# Altium PCB CSC002.pcbdoc (part 2 of 3)
Units mm, origin at the board's own origin, x right, y up, seen from the top; angles counter-clockwise.
Board outline 159.86 x 75.13 mm, 6 copper layers (Top Layer, Mid-Layer 1, Mid-Layer 2, GND, POWER, Bottom Layer), stack 2.494 mm thick; 78 components, 188 nets, 791 pads, 358 vias.
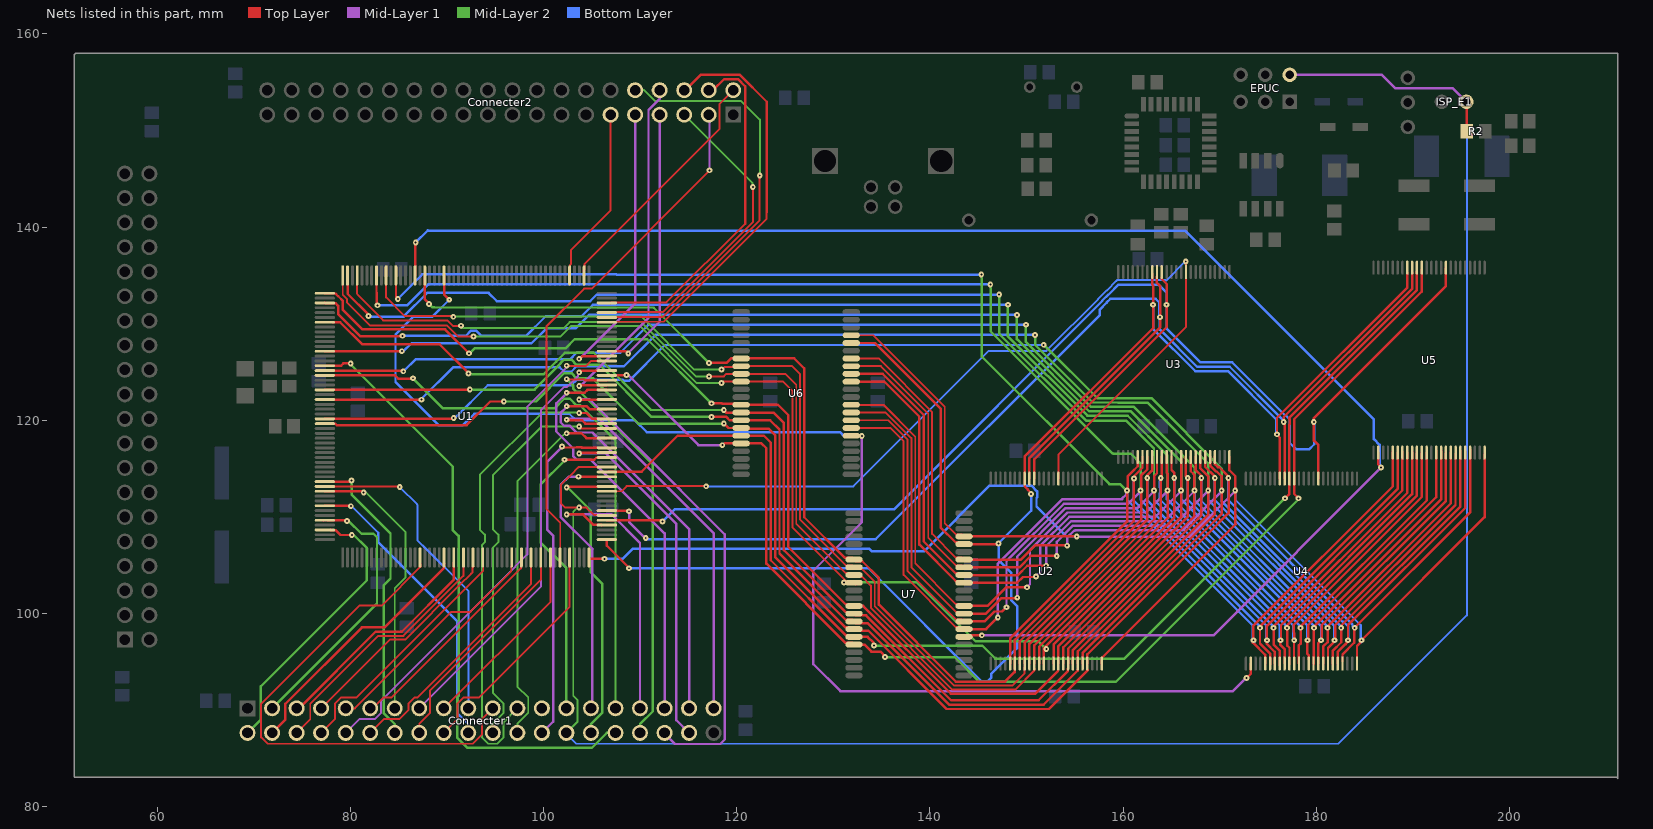
[diagram p6: the nets of this part, all layers, seen from the top]

## Via types
v1: diameter 0.6, hole 0.2, Top Layer to Bottom Layer, 354 vias
v2: diameter 0.6/0.6/0.6/0.6/0.6/0.6 (per signal layer), hole 0.2, Top Layer to Bottom Layer, 1 vias
v3: diameter 0.6, hole 0.2, Top Layer to Bottom Layer, tented bottom, 1 vias
v4: diameter 0.6, hole 0.2, Top Layer to Bottom Layer, tented top, 1 vias
v5: diameter 7, hole 3.5, Top Layer to Bottom Layer, 1 vias

## Nets (pads, with @x,y where several pads share a name; then routed paths per layer and width w, separated by ;. In a path a pad name is that pad's centre, name@x,y a point inside that pad or via, vN(x,y) a via of type N, cw(c..) or ccw(c..) an arc to the next point about the centre after c; other vN are vias at no path point) (continued)
A.16: U1.104 U2.48 U3.48 U4.48 U5.48 U6.19 U7.19 | length 189.5
  Top Layer w0.2: U6.19@131.853,128.8 134.131,128.8 141.537,121.394 141.537,109.323 142.688,108.172 U7.19@143.337,108.172
  Top Layer w0.254: 104.85,105.65 v1(106.3,105.65) ; U7.19@143.537,107.972 v2@155.11,107.972 ; U2.48@157.804,94.808 157.804,95.414 171.625,109.235 ; U3.48@171.012,116.202 171.012,114.818 171.62,114.21 171.62,109.27 171.65,109.24 ; U4.48@184.22,94.808 184.22,96.621 184.65,97.051 v1@184.65,97.19 ; v1(184.69,97.22) 197.44,109.97 U5.48@197.44,116.47
  Mid-Layer 1 w0.254: v2(155.2,107.95) 166.86,107.95 ; 166.92,107.96 v1@171.66,112.7
  Bottom Layer w0.254: v1(106.3,105.65) 108.18,105.65 109.21,106.68 133.743,106.68 134,106.423 139.376,106.423 146.18,113.227 150.5,113.227 151.097,112.63 151.097,112.044 151.033,111.98 151.033,111.074 154.137,107.97 v2@155.2,107.97 ; v1(171.61,112.72) 171.61,111.767 184.607,98.77 184.607,97.083 v1@184.66,97.03
A.17: U1.105 U2.17 U3.17 U4.17 U5.17 U6.18 U7.18 | length 176.4
  Top Layer w0.254: U1.105@106.548,107.646 106.548,107.002 v1@108.825,104.725 ; U6.18@131.853,128 134.327,128 141.11,121.217 141.11,108.912 142.677,107.345 U7.18@143.364,107.345 ; U7.18@143.537,107.172 147.002,107.172 v1@147.08,107.25 ; U7.18@143.85,107.15 U7.18@143.97,107.03 ; U2.17@149.8,113.76 U2.17@149.8,113.957 ; U2.17@149.8,114.22 U2.17@149.8,113.957 ; U2.17@149.804,113.957 149.804,113.165 150.151,112.818 150.151,112.779 v1@150.39,112.54 ; U3.17@163.01,135.15 163.01,134.06 163.121,133.949 163.121,129.549 149.8,116.228 U2.17@149.8,113.957 ; v1(175.94,118.54) 175.94,120.262 189.437,133.759 U5.17@189.437,135.293 ; v1@175.95,118.48 176.22,118.21 U4.17@176.22,113.957
  Bottom Layer w0.254: v1@108.9,104.67 133.623,104.67 145.33,92.963 145.97,92.963 146.337,93.33 146.337,93.723 149.027,96.413 149.027,100.756 148.413,101.37 148.413,104.227 147.11,105.53 v1@147.11,107.26 ; v1@147.03,107.34 v1@147.11,107.26 ; v1(147.1,107.25) v1@147.11,107.26 ; v1@150.49,112.33 150.49,110.64 v1@147.11,107.26 ; v1(163.11,131.96) 163.11,129.454 167.478,125.086 170.861,125.086 175.857,120.09 175.857,118.663 v1@176,118.52
  other v1: 108.85,104.675 150.47,112.37
A.18: U1.111 U2.16 U3.16 U4.16 U5.16 | length 142.4
  Top Layer w0.254: U1.111@107.1,110.625 107.102,110.623 108.802,110.623 v1(108.85,110.575) ; U2.16@150.3,113.93 150.3,116.086 163.827,129.613 163.827,133.903 163.51,134.22 U3.16@163.51,134.88 ; v1@176.62,119.77 176.72,119.67 U4.16@176.72,113.957 ; v1(176.63,119.83) 176.63,120.31 189.93,133.61 U5.16@189.93,135.29
  Mid-Layer 1 w0.254: v1(108.85,110.575) 108.85,109.45 v1@110.5,107.8
  Bottom Layer w0.254: v1@110.625,107.677 134.374,107.677 157.593,130.896 157.593,131.457 158.303,132.167 158.303,132.199 158.67,132.567 158.703,132.567 158.723,132.587 163.37,132.587 163.737,132.22 163.737,130.713 v1@163.79,130.66 ; v1(163.82,130.67) 163.82,129.386 167.666,125.54 171.049,125.54 176.699,119.89 v1@176.72,119.89
  other v1: 110.575,107.8
A.19: U1.109 U2.15 U3.15 U4.9 U5.9 | length 150.7
  Top Layer w0.254: U1.109@106.548,109.646 112.179,109.646 v1(112.3,109.525) ; U2.15@150.8,113.957 150.8,115.944 164.52,129.664 164.52,134.1 164.02,134.6 U3.15@164.02,134.76 ; v1@179.75,119.76 179.75,117.894 180.22,117.424 U4.9@180.22,113.957 ; v1(179.75,119.81) 179.75,120.219 193.43,133.899 U5.9@193.43,135.751
  Bottom Layer w0.254: v1(112.3,109.525) 113.552,110.777 136.271,110.777 157.849,132.355 ; 157.849,132.387 158.482,133.021 ; 158.515,133.021 159.534,134.04 163.68,134.04 164.497,133.223 v1@164.497,131.96 ; v1@164.51,131.88 164.51,129.496 168.012,125.994 171.303,125.994 176.84,120.457 ; 176.89,120.457 177.257,120.09 177.257,117.663 177.94,116.98 179.25,116.98 179.79,117.52 v1@179.79,119.81
  other v1: 164.51,131.96
A.20: U1.115 U2.10 U3.10 | length 98
  Top Layer w0.2: U1.115@106.548,112.646 108.071,112.646 108.6,113.175 v1@116.85,113.175 ; U2.10@153.27,113.85 153.31,113.89 153.31,116.426 166.512,129.628 U3.10@166.512,135.351 v1@166.512,136.318
  Bottom Layer w0.2: v1@116.875,113.15 132.069,113.15 146.099,127.18 152.07,127.18 157.422,132.532 157.422,132.564 158.305,133.448 158.338,133.448 159.313,134.423 159.313,134.467 159.366,134.52 164.404,134.52 164.457,134.467 166.455,136.465 v1@166.57,136.58
  other v1: 116.83,113.16 166.49,136.43
BLS0: U1.119 U4.15 U5.15 U6.39 U7.39 | length 124.1
  Top Layer w0.254: U1.119@106.68,114.669 110.144,114.669 113.875,118.4 U6.39@120.453,118.4 122.801,118.4 123.515,117.686 123.515,105.507 131.277,97.745 131.964,97.745 U7.39@132.137,97.572 133.548,97.572 134.14,96.98 ; v1(176.77,111.92) 177.22,112.37 ; 177.22,112.41 U4.15@177.22,113.957 177.2,113.977 177.2,119.513 177.257,119.57 177.257,120.09 177.2,120.147 177.2,120.238 190.43,133.468 U5.15@190.43,135.36
  Mid-Layer 2 w0.254: v1(134.2,96.67) 134.221,96.649 145.431,96.649 146.78,95.3 160.1,95.3 ; 160.145,95.325 v1@176.73,111.91
BLS1: U1.139 U4.14 U5.14 U6.40 U7.40 | length 128.8
  Top Layer w0.254: U1.139@107.11,124.66 107.119,124.669 v1@108.539,124.669 ; v1@118.73,117.6 U6.40@120.453,117.6 ; U6.40@120.65,117.49 120.76,117.6 122.558,117.6 123.061,117.097 123.061,105.161 131.277,96.945 131.964,96.945 U7.40@132.137,96.772 ; U7.40@132.824,96.772 U7.40@132.137,96.772 ; v1@135.41,95.5 134.867,96.043 133.94,96.043 133.211,96.772 U7.40@132.137,96.772 ; U4.14@177.72,113.957 177.72,112.37 v1@178.16,111.93 ; U4.14@177.72,114.05 177.72,120.116 190.93,133.326 U5.14@190.93,135.61
  Mid-Layer 1 w0.254: v1@108.61,124.83 116.02,117.42 v1(118.5,117.42)
  Mid-Layer 2 w0.254: v1(135.36,95.48) 142.566,95.48 145.136,92.91 147.267,92.91 147.27,92.913 159.243,92.913 v1@178.2,111.87
  other v1: 178.17,111.92 108.57,124.7
CS0: U1.187 U4.26 U6.6 | length 140.1
  Top Layer w0.254: U1.187@89.698,134.996 89.698,133.002 v1@90.19,132.51 ; v1@172.83,93.35 173.22,93.74 U4.26@173.22,94.808
  Mid-Layer 1 w0.254: v1(132.95,118.37) 132.95,109.437 127.925,104.412 127.925,94.75 130.722,91.953 171.363,91.953 v1@172.79,93.38
  Bottom Layer w0.254: v1(90.23,132.48) 88.49,130.74 86.513,130.74 84.663,128.89 84.663,123.95 89.11,119.503 91.65,119.503 92.824,120.677 102.65,120.677 103.34,119.987 109.462,119.987 110.682,118.767 130.68,118.767 130.987,118.46 v1@132.92,118.46
  other v1: 172.78,93.32
CS1: U1.193 U5.26 U7.6 | length 168.1
  Top Layer w0.254: v1@86.66,138.44 86.698,138.402 U1.193@86.698,134.996 ; U7.6@143.89,97.73 v1(145.37,97.73) ; U5.26@186.428,116.652 186.428,115.422 v1@186.74,115.11
  Mid-Layer 1 w0.254: v1(145.37,97.73) 169.35,97.73 v1@186.71,115.09
  Bottom Layer w0.254: v1(86.75,138.4) 88.02,139.67 ; 88.06,139.64 166.407,139.64 185.977,120.07 185.977,118.039 186.57,117.446 v1@186.57,115.15
  other v1: 186.7,115.1
D.0: U1.197 U2.29 U3.29 U4.29 U5.29 U6.7 U7.7 | length 223.7
  Top Layer w0.2: v1@84.698,132.742 U1.197@84.698,134.996 ; U6.7@131.853,119.2 135.895,119.2 137.28,117.815 137.28,103.981 142.688,98.572 U7.7@143.337,98.572
  Top Layer w0.254: U7.7@143.537,98.372 145.822,98.372 v1@146.96,99.51 ; U2.29@148.304,94.808 148.3,94.811 148.3,97.401 160.41,109.511 v1(160.41,112.72) ; v1@160.34,112.73 160.473,112.863 160.473,114.194 160.916,114.637 160.919,114.637 161.52,115.238 U3.29@161.52,116.14 ; v1@173.45,97.13 173.45,96.982 174.72,95.712 U4.29@174.72,94.808 ; v1(173.49,97.22) 173.49,98.73 187.93,113.17 U5.29@187.93,116.71
  Mid-Layer 1 w0.254: v1(147.03,99.57) 147.03,105.161 153.677,111.808 159.91,111.808 ; 159.85,111.833 160.35,112.333 v1@160.35,112.65
  Mid-Layer 2 w0.254: v1@145.38,135.08 145.38,126.58 158.577,113.383 159.677,113.383 v1@160.34,112.72
  Bottom Layer w0.2: v1@160.3,112.84 v1@160.42,112.72
  Bottom Layer w0.254: v1@84.89,132.56 87.43,135.1 107.533,135.1 107.58,135.053 145.273,135.053 v1(145.32,135.1) ; v1(160.41,112.72) 160.41,111.767 173.407,98.77 173.407,97.263 v1@173.63,97.04
  other v1: 84.9,132.55
D.1: U1.201 U2.31 U3.31 U4.31 U5.31 U6.8 U7.8 | length 227.2
  Top Layer w0.2: U6.8@131.853,120 135.661,120 137.68,117.981 137.68,104.381 142.688,99.372 U7.8@143.337,99.372
  Top Layer w0.254: U1.201@82.698,134.996 82.698,133.212 82.73,133.18 82.73,132 v1@82.82,131.91 ; U7.8@143.537,99.172 145.646,99.172 146.671,100.197 147.447,100.197 v1@147.94,100.69 ; U2.31@149.304,94.808 149.304,97.121 161.902,109.718 ; 161.873,109.737 161.873,114.285 162.512,114.924 U3.31@162.512,116.202 ; U4.31@175.71,94.78 175.71,96.01 174.89,96.83 v1(174.89,97.22) 174.89,98.71 188.93,112.75 U5.31@188.93,116.754
  Mid-Layer 1 w0.254: v1(147.93,100.64) 147.93,105.419 153.865,111.354 160.56,111.354 ; 160.559,111.379 v1@161.9,112.72
  Mid-Layer 2 w0.254: v1@146.3,133.97 146.3,129.19 158.92,116.57 ; 158.96,116.55 160.8,116.55 161.81,115.54 v1(161.81,112.72)
  Bottom Layer w0.254: v1@82.75,131.9 v1(82.81,131.9) 85.87,131.9 88.03,134.06 v1(146.25,134.06) ; v1(161.81,112.72) 161.81,111.767 174.807,98.77 174.807,97.223 v1@174.99,97.04
D.2: U1.207 U2.33 U3.33 U4.33 U5.33 U6.9 U7.9 | length 231.4
  Top Layer w0.2: U6.9@131.853,120.8 135.427,120.8 138.08,118.147 138.08,104.781 142.688,100.172 U7.9@143.337,100.172
  Top Layer w0.254: U1.207@79.675,134.01 79.721,133.964 79.721,133.089 81.87,130.94 v1(81.87,130.81) ; U7.9@143.537,99.972 145.804,99.972 147.422,101.59 v1@149,101.59 ; U2.33@150.304,94.808 150.304,96.836 163.274,109.806 ; 163.21,109.76 163.21,114.207 163.512,114.509 U3.33@163.512,116.202 ; U4.33@176.72,94.82 176.72,96.31 176.29,96.74 v1(176.29,97.22) 176.353,97.283 176.353,98.77 176.72,99.137 176.723,99.137 189.93,112.344 U5.33@189.93,116.71
  Mid-Layer 1 w0.254: v1(149.04,101.63) 149.04,105.887 154.053,110.9 161.49,110.9 ; 161.485,110.925 v1@163.21,112.65
  Mid-Layer 2 w0.254: v1@147.17,132.96 147.17,128.962 156.202,119.93 160.34,119.93 163.2,117.07 v1@163.2,112.64
  Bottom Layer w0.254: v1@81.87,130.74 85.51,130.74 87.95,133.18 94.303,133.18 95.163,132.32 104.817,132.32 105.507,133.01 v1(147.17,133.01) ; v1(163.21,112.72) 163.21,111.767 176.207,98.77 176.207,97.123 v1@176.29,97.04
D.3: U1.3 U2.35 U3.35 U4.35 U5.35 U6.10 U7.10 | length 233.9
  Top Layer w0.2: U6.10@131.853,121.6 135.192,121.6 138.48,118.313 138.48,105.181 142.688,100.972 U7.10@143.337,100.972 ; U4.35@177.72,94.71 v1(177.72,97.22)
  Top Layer w0.254: U1.3@77.348,132.146 77.371,132.123 78.446,132.123 78.725,131.844 78.725,130.995 81.03,128.69 v1@85.35,128.69 ; U1.3@77.81,132.13 U1.3@77.817,132.123 ; U7.10@143.537,100.772 145.962,100.772 147.88,102.69 v1@149.99,102.69 ; U2.35@151.304,94.808 151.304,96.552 164.66,109.908 ; U3.35@164.51,116.2 U3.35@164.512,116.202 164.512,114.576 164.64,114.448 164.64,109.93 164.661,109.909 ; v1(177.72,97.22) 177.69,98.82 190.93,112.06 190.93,116.564 U5.35@190.94,116.574
  Mid-Layer 1 w0.254: v1(150.04,102.7) 150.363,103.023 150.363,106.568 154.241,110.446 162.42,110.446 ; 162.411,110.471 v1@164.61,112.67
  Mid-Layer 2 w0.254: v1@148.04,131.89 148.04,128.734 156.3,120.474 158.955,120.474 158.959,120.47 160.487,120.47 164.6,116.357 v1@164.6,112.64
  Bottom Layer w0.254: v1@85.45,128.7 85.48,128.73 91.933,128.73 92.49,129.287 93.01,129.287 93.567,128.73 98.18,128.73 100.22,130.77 101.277,130.77 101.28,130.767 103.906,130.767 105.099,131.96 v1(148.09,131.96) ; v1@164.54,112.66 164.54,111.837 177.607,98.77 177.607,97.303 v1(177.72,97.22)
  other v1: 164.61,112.72 85.4,128.74
D.4: U1.13 U2.38 U3.38 U4.38 U5.38 U6.13 U7.13 | length 231.6
  Top Layer w0.254: U1.13@77.348,127.146 v1@85.26,127.146 ; U6.13@131.853,124 135.27,124 138.907,120.363 138.907,107.115 142.677,103.345 U7.13@143.364,103.345 ; U7.13@143.537,103.172 149.022,103.172 149.62,103.77 v1@150.97,103.77 ; U2.38@152.804,94.808 152.804,96.768 166.012,109.976 166.012,116.042 U3.38@166.02,116.05 ; U4.38@179.21,95.24 179.21,95.68 179.09,95.8 v1(179.09,97.22) 179.153,97.283 179.153,98.77 192.43,112.047 U5.38@192.43,116.83
  Mid-Layer 1 w0.254: v1(150.99,103.81) 151.413,104.233 151.413,106.976 154.429,109.992 163.33,109.992 ; 163.338,110.008 v1@166.02,112.69
  Mid-Layer 2 w0.254: v1@149.01,131.02 149.01,128.406 156.488,120.928 159.143,120.928 159.147,120.924 160.675,120.924 160.806,120.924 166.01,115.72 v1(166.01,112.72)
  Bottom Layer w0.254: v1@85.45,127.1 86.34,127.99 91.731,127.99 91.748,127.973 98.745,127.973 100.292,129.52 101.273,129.52 101.28,129.513 103.313,129.513 104.71,130.91 v1(149.01,130.91) ; v1@166,112.81 166,111.84 179.09,98.75 v1(179.09,97.22)
  other v1: 85.32,127.15
D.5: U1.17 U2.40 U3.40 U4.40 U5.40 U6.14 U7.14 | length 232.6
  Top Layer w0.254: U1.17@78.06,125.13 v1@85.47,125.13 ; v1@85.37,124.97 v1(85.47,125.07) ; U6.14@131.853,124.8 135.112,124.8 139.361,120.551 139.361,107.461 142.677,104.145 U7.14@143.364,104.145 ; U7.14@143.537,103.972 149.106,103.972 150.074,104.94 v1@152.01,104.94 ; U2.40@153.804,94.808 153.804,96.484 167.012,109.692 ; U3.40@167.012,116.202 167.012,114.724 167.39,114.346 167.39,110.074 167.312,109.996 167.312,109.992 167.03,109.71 ; U4.40@180.22,94.808 180.22,96.93 v1@180.49,97.2 ; v1(180.49,97.22) 180.553,97.283 180.553,98.77 180.92,99.137 180.92,99.14 193.43,111.65 U5.40@193.43,116.59
  Mid-Layer 1 w0.254: v1(152.04,104.94) 152.04,106.961 154.617,109.538 164.328,109.538 164.34,109.55 ; 164.274,109.554 v1@167.42,112.7
  Mid-Layer 2 w0.254: v1@149.94,129.79 149.94,128.118 156.676,121.382 159.331,121.382 159.335,121.378 160.994,121.378 161.122,121.378 167.41,115.09 ; v1(167.41,112.72) 167.41,115.09 ; 167.42,115.08 167.41,115.09
  Bottom Layer w0.254: v1@85.57,125.14 86.74,126.31 92.003,126.31 92.01,126.303 102.736,126.303 103.42,126.987 107.94,126.987 110.843,129.89 v1(149.96,129.89) ; v1(167.41,112.72) 167.41,111.714 179.987,99.137 180.04,99.137 180.5,98.677 v1@180.5,97.24
D.6: U1.23 U2.42 U3.42 U4.42 U5.42 U6.15 U7.15 | length 236.2
  Top Layer w0.2: U6.15@131.853,125.6 134.916,125.6 139.829,120.687 139.829,107.831 142.688,104.972 U7.15@143.337,104.972
  Top Layer w0.254: U1.23@77.348,122.146 v1@87.33,122.146 ; U7.15@143.632,104.867 U7.15@143.537,104.772 149.264,104.772 150.442,105.95 v1@153.1,105.95 ; U2.42@154.804,94.808 154.804,96.2 168.22,109.616 168.22,109.62 168.738,110.138 168.742,110.138 ; U3.42@168.012,116.202 168.012,115.008 168.81,114.21 168.81,110.23 ; U4.42@181.22,94.808 181.22,96.42 v1@181.93,97.13 ; v1(181.89,97.22) 181.953,97.283 181.953,98.77 194.42,111.237 U5.42@194.42,116.514
  Mid-Layer 1 w0.254: v1(153.13,105.95) 153.13,107.409 154.805,109.084 165.224,109.084 ; 165.22,109.1 v1@168.84,112.72
  Mid-Layer 2 w0.254: v1@150.9,128.89 150.9,127.8 156.864,121.836 159.519,121.836 159.523,121.832 161.31,121.832 162.528,121.832 168.81,115.55 ; v1(168.81,112.72) 168.81,115.5
  Bottom Layer w0.254: v1@87.43,122.29 90.617,125.477 101.676,125.477 102.13,125.023 102.856,125.023 103.42,125.587 108.314,125.587 111.567,128.84 v1(150.88,128.84) ; v1(168.81,112.72) 168.81,111.598 168.979,111.598 181.877,98.7 181.877,97.213 v1@181.98,97.11
  other v1: 87.37,122.13
D.7: U1.27 U2.44 U3.44 U4.44 U5.44 U6.16 U7.16 | length 237
  Top Layer w0.2: U6.16@131.853,126.4 134.681,126.4 140.229,120.852 140.229,108.231 142.688,105.772 U7.16@143.337,105.772
  Top Layer w0.254: U1.27@77.348,120.146 v1@90.6,120.146 ; U7.16@143.537,105.572 149.422,105.572 150.89,107.04 v1@154.06,107.04 ; U2.44@155.804,94.808 155.804,95.916 168.596,108.708 168.608,108.708 170.105,110.205 ; U3.44@169.012,116.202 169.012,115.32 169.637,114.696 169.701,114.696 170.2,114.197 170.2,110.312 ; U4.44@182.22,94.808 182.22,95.998 183.044,96.822 183.044,96.824 v1@183.36,97.14 ; v1(183.29,97.22) 183.29,98.79 195.43,110.93 U5.44@195.43,116.67
  Mid-Layer 1 w0.254: v1(154.21,107.01) 154.21,107.847 154.94,108.577 155.011,108.577 ; 155.05,108.63 166.19,108.63 v1@170.24,112.68
  Mid-Layer 2 w0.254: v1@151.785,127.695 151.925,127.695 157.33,122.29 159.707,122.29 159.711,122.286 162.716,122.286 162.924,122.286 170.21,115 v1(170.21,112.72)
  Bottom Layer w0.254: v1@90.773,120.18 94.216,123.623 102.856,123.623 103.42,124.187 108.196,124.187 108.31,124.073 108.83,124.073 112.547,127.79 151.8,127.79 v1(151.78,127.81) ; v1(170.21,112.72) 170.21,111.651 182.724,99.137 182.84,99.137 183.3,98.677 v1@183.3,97.15
  other v1: 90.69,120.22
D.8: U1.191 U2.30 U3.30 U4.30 U5.30 U6.29 U7.29 | length 170.8
  Top Layer w0.254: U1.191@87.698,134.996 87.698,132.522 ; 87.72,132.5 87.698,132.522 ; v1@88.16,132.06 87.698,132.522 ; v1@117.14,125.94 118.954,125.94 119.414,126.4 U6.29@120.453,126.4 ; U6.29@120.406,126.353 U6.29@120.453,126.4 ; U6.29@120.416,126.437 U6.29@120.453,126.4 ; U2.30@148.804,94.808 148.804,97.035 ; U3.30@162.012,116.202 162.012,115.088 161.1,114.176 161.1,109.559 148.804,97.263 148.804,97.035 ; U4.30@175.22,94.75 175.23,94.76 175.23,95.844 174.18,96.894 v1(174.18,98.51) 174.18,98.642 188.43,112.892 U5.30@188.43,116.644 ; U6.29@120.453,126.4 125.95,126.4 126.985,125.365 126.985,109.956 131.196,105.745 131.964,105.745 U7.29@132.137,105.572 132.31,105.399 132.997,105.399 134.717,103.679 134.717,100.905 142.677,92.945 147.785,92.945 148.77,93.93 148.77,94.607 148.758,94.619 148.758,96.989 148.804,97.035
  Mid-Layer 2 w0.254: v1@88.12,132.07 88.496,131.694 88.66,131.694 111.405,131.655 v1(117.12,125.94) v1@116.964,125.94
  Bottom Layer w0.254: v1@161.11,114.02 161.11,111.709 174.18,98.639 v1(174.18,98.51)
  other v1: 161.14,113.97 88.13,132.03
D.9: U1.199 U2.32 U3.32 U4.32 U5.32 U6.30 U7.30 | length 172.4
  Top Layer w0.2: U1.199@83.698,134.996 83.698,132.728 85.646,130.78 v1@90.63,130.78 ; v1@118.45,125.26 118.703,125.513 120.366,125.513 U6.30@120.453,125.6 ; U6.30@120.43,125.6 U6.30@120.453,125.6 ; U2.32@149.8,94.47 149.81,94.46 149.81,93.8 148.528,92.518 142.5,92.518 134.29,100.728 134.29,103.268 132.986,104.572 132.337,104.572 U7.30@132.137,104.772 131.937,104.972 131.288,104.972 126.558,109.702 126.558,124.776 125.734,125.6 U6.30@120.453,125.6
  Top Layer w0.254: U2.32@149.804,94.808 149.804,96.978 162.49,109.665 162.49,114.26 163.012,114.782 U3.32@163.012,116.202 ; U4.32@176.21,94.63 176.21,96.16 175.58,96.79 v1(175.58,98.51) 175.58,98.639 189.42,112.479 U5.32@189.42,116.66
  Mid-Layer 2 w0.2: v1@90.79,130.75 90.8,130.76 110.095,130.76 115.605,125.25 v1(118.41,125.25)
  Bottom Layer w0.254: v1@162.51,113.97 162.51,111.709 175.58,98.639 v1(175.58,98.51)
  other v1: 162.5,114.01 90.65,130.71
D.10: U1.205 U2.34 U3.34 U4.34 U5.34 U6.31 U7.31 | length 175.7
  Top Layer w0.2: 80.698,133.1 U1.205@80.698,134.996 ; 80.7,133.03 83.38,130.35 90.03,130.35 90.64,129.74 v1@91.39,129.74 ; v1@117.12,124.55 118.67,124.55 118.92,124.8 U6.31@120.453,124.8 ; U6.31@120.69,124.8 125.01,124.8 126.158,123.652 126.158,109.302 131.288,104.172 131.937,104.172 U7.31@132.137,103.972 132.337,103.772 132.986,103.772 133.89,102.868 133.89,100.563 142.335,92.118 148.815,92.118 150.837,94.14 150.837,94.283 U2.34@150.8,94.32
  Top Layer w0.254: U2.34@150.804,94.808 150.804,96.694 163.91,109.801 v1@163.91,113.96 ; v1@164.012,114.032 U3.34@164.012,116.202 ; U4.34@177.23,94.71 177.23,96.442 176.98,96.692 v1(176.98,98.51) 176.98,98.752 190.43,112.202 U5.34@190.43,116.61
  Mid-Layer 2 w0.2: v1@91.36,129.72 91.54,129.54 102.066,129.54 102.686,130.16 110.13,130.16 115.75,124.54 v1(117.12,124.54) v1@117.23,124.65
  Bottom Layer w0.254: v1@163.96,113.87 163.799,113.709 163.799,113.055 163.837,113.017 163.837,112.46 163.799,112.423 163.799,111.819 176.98,98.639 v1(176.98,98.51)
  other v1: 163.9,114.01 91.46,129.79
D.11: U1.208 U2.36 U3.36 U4.36 U5.36 U6.32 U7.32 | length 175.9
  Top Layer w0.2: U1.208@79.198,134.996 79.198,132.986 79.647,132.537 79.647,132.183 82,129.83 89.984,129.83 91.164,128.65 v1@92.74,128.65 ; v1@118.57,124 U6.32@120.453,124 ; U6.32@120.49,124 124.794,124 125.758,123.036 125.758,108.902 131.288,103.372 131.937,103.372 U7.32@132.137,103.172 U7.32@132.337,102.972
  Top Layer w0.254: U2.36@151.804,94.808 151.804,96.41 165.31,109.916 v1@165.31,113.99 ; U3.36@165.012,116.202 165.012,114.868 165.29,114.59 v1@165.29,114.01 ; U4.36@178.21,94.85 178.21,96.7 178.38,96.87 v1(178.38,98.51) 178.38,98.639 191.446,111.704 ; 191.428,111.722 U5.36@191.428,116.652
  Mid-Layer 2 w0.2: v1@92.74,128.65 101.741,128.65 102.851,129.76 109.964,129.76 115.874,123.85 v1(118.41,123.85) v1@118.424,123.85
  Mid-Layer 2 w0.254: v1(131.1,103.21) 138.636,103.21 144.743,97.103 151.227,97.103 v1@152.06,96.27
  Bottom Layer w0.254: v1(165.3,114.01) 165.3,111.719 178.37,98.649 v1@178.37,98.54
  other v1: 152.05,96.3 92.75,128.66
D.12: U1.1 U2.39 U3.39 U4.39 U5.39 U6.35 U7.35 | length 179.4
  Top Layer w0.254: U1.1@77.348,133.146 77.371,133.123 78.446,133.123 78.725,132.844 78.736,132.844 79.22,132.36 79.22,131.43 81.11,129.54 ; 81.14,129.51 81.11,129.54 ; v4@92.32,126.89 89.807,129.403 81.247,129.403 81.11,129.54 ; v1@117.36,121.75 118.47,121.75 118.533,121.687 120.366,121.687 U6.35@120.453,121.6 ; U6.35@120.478,121.625 124.248,121.625 125.331,120.542 125.331,106.891 131.277,100.945 131.964,100.945 U7.35@132.137,100.772 133.077,100.772 142.158,91.691 150.927,91.691 153.256,94.02 ; U2.39@153.304,94.808 153.304,96.626 166.704,110.026 ; U3.39@166.512,116.202 166.512,114.198 v1(166.7,114.01) 166.7,110.022 ; v1@179.7,98.54 179.72,98.52 U4.39@179.72,94.808 ; v1(179.78,98.51) 179.78,98.642 192.93,111.792 U5.39@192.93,116.792
  Mid-Layer 2 w0.254: v4@92.23,127.03 92.43,127.03 92.841,127.441 102.268,127.441 103.214,128.387 110.733,128.387 v1(117.37,121.75)
  Bottom Layer w0.254: v1(166.7,114.01) 166.7,111.782 179.73,98.752 v1@179.73,98.4
  other v4: 92.27,126.93
D.13: U1.7 U2.41 U3.41 U4.41 U5.41 U6.36 U7.36 | length 179.2
  Top Layer w0.254: U1.7@78.17,130.14 78.938,130.14 81.228,127.85 89.25,127.85 v1@92.22,124.88 ; v1@118.67,121.05 118.92,120.8 U6.36@120.453,120.8 U6.36@120.416,120.837 ; U6.36@120.46,120.8 123.803,120.8 124.877,119.726 124.877,106.545 131.277,100.145 131.964,100.145 U7.36@132.137,99.972 132.31,99.799 133.391,99.799 142.18,91.01 151.246,91.01 154.29,94.054 U2.41@154.29,94.28 ; U2.41@154.304,94.808 154.304,96.342 167.766,109.804 167.766,109.808 168.1,110.142 168.1,114.278 167.512,114.866 U3.41@167.512,116.202 ; U4.41@180.72,94.808 180.72,96.563 181.19,97.033 v1@181.19,98.54 ; v1(181.18,98.51) 181.18,98.639 193.93,111.389 U5.41@193.93,116.69
  Mid-Layer 2 w0.254: v1@92.12,124.78 100.01,124.78 101.309,126.079 101.309,126.098 102.198,126.987 105.195,126.987 111.122,121.06 v1(118.66,121.06)
  Bottom Layer w0.254: v3(168.1,114.01) 168.1,111.666 180.175,99.591 180.228,99.591 181.18,98.639 v1@181.18,98.49
  other v1: 92.22,124.85
D.14: U1.21 U2.43 U3.43 U4.43 U5.43 U6.37 U7.37 | length 179.2
  Top Layer w0.254: U1.21@77.348,123.146 v1@92.37,123.146 ; v1@117.34,120.36 118.718,120.36 118.732,120.346 118.92,120.346 119.266,120 U6.37@120.453,120 ; U6.37@120.47,120 123.46,120 124.423,119.037 124.423,106.199 131.277,99.345 131.964,99.345 U7.37@132.137,99.172 132.31,98.999 133.531,98.999 141.974,90.556 151.792,90.556 155.296,94.06 U2.43@155.296,94.224 ; U2.43@155.304,94.808 155.304,96.058 169.493,110.247 ; U3.43@168.512,116.202 168.512,115.178 v1@169.52,114.17 ; v1(169.5,114.01) 169.5,110.26 169.503,110.257 ; U4.43@181.72,94.808 181.72,96.14 182.59,97.01 v1@182.59,98.5 ; v1(182.58,98.51) 182.58,98.724 194.93,111.074 U5.43@194.93,116.82
  Mid-Layer 2 w0.254: v1@92.45,123.18 99.06,123.18 101.763,125.883 101.763,125.91 102.13,126.277 102.876,126.277 103.42,125.733 105.807,125.733 111.19,120.35 v1(117.37,120.35)
  Bottom Layer w0.254: v1(169.5,114.01) 169.5,111.719 182.66,98.559 v1@182.66,98.34
  other v1: 92.36,123.18
D.15: U1.28 U2.45 U3.45 U4.45 U5.45 U6.38 U7.38 | length 180.4
  Top Layer w0.254: U1.28@77.96,119.669 78.006,119.623 78.446,119.623 78.579,119.49 92.03,119.49 94.48,121.94 v1(95.88,121.94) ; v1@118.67,119.67 119.14,119.2 U6.38@120.453,119.2 ; U6.38@120.46,119.14 123.304,119.14 123.969,118.475 123.969,105.853 131.277,98.545 131.964,98.545 U7.38@132.137,98.372 132.31,98.199 133.621,98.199 141.718,90.102 152.338,90.102 156.256,94.02 156.256,94.036 U2.45@156.32,94.1 ; U2.45@156.304,94.808 156.304,95.774 168.784,108.254 168.796,108.254 170.92,110.378 170.92,114.192 170.918,114.192 169.96,115.15 169.825,115.15 169.512,115.462 U3.45@169.512,116.202 ; U4.45@182.72,95.041 182.72,95.763 183.917,96.96 183.917,98.417 v1@184.03,98.53 ; v1(183.98,98.51) 195.93,110.46 U5.45@195.93,116.93
  Mid-Layer 2 w0.254: v1(95.88,121.94) 99.193,121.94 102.13,124.877 102.876,124.877 103.42,124.333 105.13,124.333 109.803,119.66 v1(118.66,119.66)
  Bottom Layer w0.254: v1(170.9,114.01) 170.9,111.719 183.754,98.865 183.754,98.646 v1@183.86,98.54
EXT1-2: Connecter1.2 U1.50 | length 28.7
  Top Layer w0.254: U1.50@77.94,108.64 77.957,108.623 78.446,108.623 78.949,108.12 v1(80.14,108.12)
  Mid-Layer 2 w0.254: Connecter1.2@69.342,87.63 70.73,89.018 70.73,92.463 81.697,103.43 81.697,106.763 v1@80.24,108.22
EXT1-3: Connecter1.3 U1.48 | length 27.9
  Top Layer w0.254: U1.48@77.21,109.63 U1.48@77.217,109.623 ; U1.48@77.61,109.659 77.646,109.623 79.597,109.623 v1(79.65,109.57)
  Mid-Layer 2 w0.254: Connecter1.3@71.882,90.17 82.747,101.035 82.747,107.88 82.38,108.247 81.86,108.247 81.856,108.243 81.14,108.243 v1@79.812,109.572
EXT1-4: Connecter1.4 U1.74 | length 26.3
  Top Layer w0.254: Connecter1.4@71.882,87.63 73.27,89.018 73.27,90.647 81.183,98.56 83.537,98.56 89.675,104.698 89.675,105.094 U1.74@89.721,105.14
EXT1-5: Connecter1.5 U1.76 | length 23.6
  Top Layer w0.254: Connecter1.5@74.422,90.17 74.658,90.17 82.594,98.106 85.306,98.106 90.675,103.475 90.675,105.244 U1.76@90.721,105.29
EXT1-6: Connecter1.6 U1.78 | length 26.5
  Top Layer w0.2: Connecter1.6@74.422,87.63 75.837,89.045 75.837,90.636 82.88,97.679 85.483,97.679 91.682,103.878 U1.78@91.682,105.442
EXT1-7: Connecter1.7 U1.80 | length 22.2
  Top Layer w0.2: Connecter1.7@76.962,90.17 84.071,97.279 85.649,97.279 91.268,102.898 91.284,102.898 92.499,104.114 92.499,104.13 92.648,104.278 92.648,104.76 U1.80@92.748,104.86
EXT1-8: Connecter1.8 U1.82 | length 25.1
  Top Layer w0.2: Connecter1.8@76.962,87.63 78.377,89.045 78.377,90.636 79.036,91.295 80.627,91.295 93.748,104.416 U1.82@93.748,104.86
EXT1-9: Connecter1.9 U1.88 | length 23.6
  Top Layer w0.2: Connecter1.9@79.502,90.17 80.451,90.17 90.441,100.16 92.42,100.16 96.648,104.388 96.648,104.888 U1.88@96.68,104.92
EXT1-10: Connecter1.10 U1.142 | length 52.7
  Top Layer w0.2: v1@102.39,125.6 104.38,125.6 104.926,126.146 U1.142@106.548,126.146
  Mid-Layer 1 w0.2: Connecter1.10@79.502,87.63 80.917,89.045 82.508,89.045 83.167,89.704 83.167,90.937 95.799,103.569 95.799,103.57 98.329,106.101 ; 98.3,121.4 102.34,125.44 v1@102.34,125.65 ; 98.32,106.11 98.32,121.29
  other v1: 102.39,125.65
EXT1-11: Connecter1.11 U1.90 | length 22
  Top Layer w0.2: Connecter1.11@82.042,90.17 82.332,90.17 83.457,91.295 84.21,91.295 ; 84.275,91.295 97.648,104.668 U1.90@97.648,105.11
EXT1-12: Connecter1.12 U1.92 | length 26.3
  Top Layer w0.2: Connecter1.12@82.042,87.63 83.457,89.045 85.048,89.045 85.997,89.994 85.997,90.636 86.656,91.295 86.945,91.295 98.69,103.04 U1.92@98.69,105.93
EXT1-13: Connecter1.13 U1.42 | length 28.7
  Top Layer w0.254: U1.42@77.348,112.646 v1@81.35,112.646
  Mid-Layer 2 w0.2: v1@81.44,112.56 81.579,112.56 85.72,108.419 85.72,103.75 84.582,102.612 Connecter1.13@84.582,90.17
  other v1: 81.37,112.52
EXT1-14: Connecter1.14 U1.40 | length 31.4
  Top Layer w0.254: U1.40@77.348,113.646 79.996,113.646 v1@80.12,113.77
  Mid-Layer 2 w0.254: v1@80.05,113.68 v1@80.11,113.68 ; v1(80.11,113.76) v1@80.11,113.68 ; v1@80.15,113.68 v1@80.11,113.68 ; 84.132,108.272 80.11,112.293 v1@80.11,113.68 ; 84.147,108.17 84.147,103.625 83.43,102.908 83.43,89.693 84.582,88.541 Connecter1.14@84.582,87.63
EXT1-15: Connecter1.15 U1.140 | length 44.8
  Top Layer w0.254: v1@103.68,124.9 103.926,125.146 U1.140@106.548,125.146
  Mid-Layer 1 w0.2: Connecter1.15@87.122,90.17 99.72,102.768 99.72,121.029 102.141,123.45 102.439,123.45 103.56,124.571 v1@103.56,125.03
  other v1: 103.68,124.96
EXT1-16: Connecter1.16 U1.94 | length 22.7
  Top Layer w0.2: Connecter1.16@87.122,87.63 87.122,88.579 88.247,89.704 88.247,92.031 99.71,103.494 99.71,105.072 U1.94@99.748,105.11
EXT1-17: Connecter1.17 U1.96 | length 19.8
  Top Layer w0.2: Connecter1.17@89.662,90.17 100.72,101.228 100.72,105.238 U1.96@100.648,105.31
EXT1-18: Connecter1.18 U1.100 | length 23.6
  Top Layer w0.2: Connecter1.18@89.662,87.63 91.077,89.045 91.077,90.636 91.736,91.295 93.327,91.295 102.67,100.638 U1.100@102.67,104.92
EXT1-19: Connecter1.19 U1.41 | length 33.6
  Top Layer w0.2: U1.41@77.348,113.146 v1@85.11,113.146
  Bottom Layer w0.2: v1(85.1,113.08) 86.9,111.28 ; 86.92,111.24 86.92,107.571 87.471,107.02 87.51,107.02 92.202,102.328 Connecter1.19@92.202,90.17
EXT1-20: Connecter1.20 U1.45 | length 31
  Top Layer w0.254: U1.45@77.348,111.146 v1@79.874,111.146
  Bottom Layer w0.254: v1@80.08,111.15 82.88,108.35 ; 82.893,108.31 82.893,107.36 91.05,99.203 91.05,89.693 92.202,88.541 Connecter1.20@92.202,87.63
  other v1: 80.04,111.1
EXT1-21: Connecter1.21 U1.69 | length 52.8
  Top Layer w0.2: U1.69@87.248,105.11 87.248,104.81 83.238,100.8 80.921,100.8 70.757,90.636 70.757,87.164 71.416,86.505 92.668,86.505 93.617,87.454 93.617,89.045 Connecter1.21@94.742,90.17
EXT1-22: Connecter1.22 U1.128 | length 42.1
  Top Layer w0.254: v1@103.71,119.33 103.894,119.146 U1.128@106.548,119.146
  Mid-Layer 2 w0.2: Connecter1.22@94.742,87.63 94.742,88.579 95.867,89.704 95.867,90.636 94.741,91.761 ; 94.745,91.73 94.745,106.796 95.32,107.371 95.32,108.151 94.745,108.726 94.745,114.315 99.78,119.35 v1@103.72,119.35
  other v1: 103.68,119.36
EXT1-23: Connecter1.23 U1.130 | length 49.9
  Top Layer w0.254: v1@103.72,120.75 104.43,120.75 105.034,120.146 U1.130@106.548,120.146
  Mid-Layer 2 w0.2: Connecter1.23@97.282,90.17 95.867,88.755 95.867,87.164 95.208,86.505 94.276,86.505 93.617,87.164 93.617,107.068 93.92,107.371 93.92,108.151 93.41,108.661 93.41,114.36 99.843,120.793 103.633,120.793 v1@103.67,120.83
  other v1: 103.68,120.76
EXT1-24: Connecter1.24 U1.126 | length 38.6
  Top Layer w0.254: v1(102.39,118.65) 103.92,118.65 104.424,118.146 U1.126@106.548,118.146
  Mid-Layer 2 w0.2: Connecter1.24@97.282,87.63 97.282,88.579 98.407,89.704 98.407,91.295 97.282,92.42 97.282,113.692 v1@102.39,118.8
EXT1-25: Connecter1.25
EXT1-26: Connecter1.26 U1.124 | length 35.3
  Top Layer w0.254: v1(101.89,117.27) 101.98,117.18 103.413,117.18 103.42,117.187 103.94,117.187 103.967,117.16 106.131,117.16 U1.124@106.14,117.169
  Mid-Layer 1 w0.254: Connecter1.26@99.822,87.63 100.974,88.782 100.974,108.059 100.383,108.65 100.383,115.713 v1@101.91,117.24
EXT1-27: Connecter1.27 U1.122 | length 31.4
  Top Layer w0.254: v1(102.17,115.91) 102.23,115.85 102.26,115.88 102.3,115.92 105.247,115.92 105.45,116.123 105.573,116.123 U1.122@105.61,116.16
  Mid-Layer 2 w0.254: v1@102.19,115.85 99.693,113.353 99.693,107.36 102.362,104.691 Connecter1.27@102.362,90.17
EXT1-28: Connecter1.28 EPUC.4 ISP_E1.1 R2.1 U1.110 U1.120 | length 211.1
  Top Layer w0.2: v1@103.59,111.05 v1(103.68,110.96) 104.434,110.96 105.198,110.196 U1.110@105.92,110.196 ; 103.61,115.11 102.86,114.36 102.851,114.36 101.79,113.299 101.79,111.401 102.241,110.95 103.6,110.95 v1@103.66,111.01 ; 103.63,115.16 105.9,115.16 U1.120@105.91,115.17
  Top Layer w0.254: ISP_E1.1@195.542,152.972 195.608,152.906 R2.1@195.608,149.924
  Mid-Layer 1 w0.254: EPUC.4@177.254,155.762 186.798,155.762 188.2,154.36 194.154,154.36 ISP_E1.1@195.542,152.972
  Mid-Layer 2 w0.2: Connecter1.28@102.362,87.63 103.487,88.755 103.487,91.053 103.07,91.47 103.07,110.51 v1@103.61,111.05
  Bottom Layer w0.2: Connecter1.28@102.362,87.63 102.362,87.528 103.385,86.505 182.295,86.505 195.59,99.8 ISP_E1.1@195.59,153.33
EXT1-29: Connecter1.29 U1.118 | length 28.8
  Top Layer w0.254: v1@103.64,114.14 U1.118@105.597,114.14
  Mid-Layer 1 w0.254: v1@103.65,114.14 102.58,114.14 101.763,113.323 101.763,109.99 105.087,106.667 ; Connecter1.29@104.902,90.17 105.037,90.305 105.037,106.72
  other v1: 103.6,114.16
EXT1-30: Connecter1.30 U1.116 | length 30.7
  Top Layer w0.254: v1(102.39,113.05) 102.463,113.123 U1.116@105.62,113.123
  Mid-Layer 2 w0.254: v1@102.413,113.113 104.902,110.625 104.902,104.24 106.054,103.088 106.054,89.693 104.902,88.541 Connecter1.30@104.902,87.63
EXT1-31: Connecter1.31 U1.18 | length 61.4
  Top Layer w0.254: U1.18@77.348,124.646 84.624,124.646 84.97,124.3 v1@86.48,124.3
  Mid-Layer 2 w0.254: v1@86.485,124.305 89.57,121.22 101.127,121.22 102.13,122.223 102.73,122.223 103.42,121.533 103.794,121.533 107.442,117.885 Connecter1.31@107.442,90.17
  other v1: 86.46,124.35
EXT1-32: Connecter1.32 U1.16 | length 63.8
  Top Layer w0.254: U1.16@77.348,125.646 79.026,125.646 79.26,125.88 80.02,125.88 v1@80.05,125.85
  Mid-Layer 2 w0.254: v1@79.92,125.88 90.59,115.21 90.59,109.544 90.583,109.537 90.583,108.65 91.2,108.033 91.2,91.472 91.05,91.322 91.05,87.153 92.125,86.078 104.979,86.078 106.531,87.63 Connecter1.32@107.442,87.63
  other v1: 80.02,125.87
EXT1-33: Connecter1.33 U1.108 | length 30.1
  Top Layer w0.254: v1(102.39,110.25) 104.09,110.25 105.171,109.169 105.994,109.169 U1.108@106.04,109.123
  Mid-Layer 1 w0.254: v1@102.38,110.29 106.98,110.29 ; 107.005,110.275 109.982,107.298 Connecter1.33@109.982,90.17
EXT1-34: Connecter1.34 U1.138 | length 45.4
  Top Layer w0.254: v1@102.44,124.22 104.21,124.22 104.284,124.146 U1.138@106.548,124.146
  Mid-Layer 2 w0.254: v1@102.31,124.36 103.053,123.617 103.053,123.3 103.42,122.933 103.794,122.933 111.3,115.427 111.3,89.859 109.982,88.541 Connecter1.34@109.982,87.63
  other v1: 102.39,124.25
EXT1-35: Connecter1.35 U1.136 | length 43.2
  Top Layer w0.254: v1@102.39,122.87 104.26,122.87 104.536,123.146 U1.136@106.548,123.146
  Mid-Layer 1 w0.254: v1@102.34,123 102.504,122.836 102.406,122.836 101.309,121.739 101.309,118.844 103.057,117.097 103.053,117.093 103.053,116.3 103.42,115.933 104.867,115.933 112.522,108.278 Connecter1.35@112.522,90.17
  other v1: 102.39,122.85
EXT1-36: Connecter1.36 U1.134 | length 51.8
  Top Layer w0.254: v1@103.684,122.146 U1.134@106.548,122.146
  Mid-Layer 1 w0.254: v1@103.73,122.18 104.77,122.18 ; 104.81,122.13 104.81,122.123 109.7,117.233 109.707,117.233 118.754,108.186 118.754,86.944 118.288,86.478 118.258,86.478 113.612,86.478 112.522,87.568 Connecter1.36@112.522,87.63
  other v1: 103.68,122.16
EXT1-37: Connecter1.37 U1.132 | length 42.8
  Top Layer w0.254: v1@102.39,121.43 104.48,121.43 104.764,121.146 U1.132@106.548,121.146
  Mid-Layer 1 w0.254: v1@102.34,121.65 102.34,121.314 101.763,120.737 101.763,119.79 102.13,119.423 102.73,119.423 103.42,118.733 105.057,118.733 115.062,108.728 Connecter1.37@115.062,90.17
  other v1: 102.39,121.45
EXT1-38: Connecter1.38 U1.123 | length 37.9
  Top Layer w0.254: v1(103.68,116.56) 103.743,116.623 U1.123@106.26,116.623
  Mid-Layer 1 w0.254: v1@103.65,116.6 106.42,116.6 113.75,109.27 113.75,88.942 Connecter1.38@115.062,87.63
EXT1-39: Connecter1.39 U1.129 | length 42.5
  Top Layer w0.254: v1@102.38,120 103.98,120 104.334,119.646 U1.129@106.548,119.646
  Mid-Layer 1 w0.254: v1@102.42,120.15 103.403,120.15 103.42,120.133 105.777,120.133 117.602,108.308 Connecter1.39@117.602,90.17
  other v1: 102.39,120.05
EXT2-2: Connecter2.2 U1.158 | length 25.1
  Top Layer w0.2: U1.158@104.148,135.47 104.248,135.57 104.248,136.188 118.219,150.159 118.219,152.763 Connecter2.2@119.634,154.178
EXT2-3: Connecter2.3 U1.98 | length 53.7
  Top Layer w0.2: 100.311,129.759 104.191,133.64 104.97,133.64 v1@117.21,145.88 ; 100.32,129.769 100.32,110.81 101.72,109.41 101.72,105.818 U1.98@101.698,105.796
  Mid-Layer 1 w0.2: Connecter2.3@117.14,151.44 117.18,151.4 v1(117.18,145.88)
EXT2-4: Connecter2.4 U1.154 | length 36.2
  Top Layer w0.2: U1.154@106.91,132.096 107.01,132.196 112.716,132.196 120.876,140.356
  Top Layer w0.254: Connecter2.4@117.094,154.178 117.548,154.178 118.7,155.33 120.111,155.33 120.876,154.565 120.876,140.356
EXT2-5: Connecter2.5 U1.152 | length 32.3
  Top Layer w0.2: U1.152@107.3,131.11 107.386,131.196 112.32,131.196 121.685,140.561 v1@121.685,144.055
  Mid-Layer 2 w0.2: Connecter2.5@114.554,151.638 121.63,144.562 v1@121.63,144.06
  other v1: 121.66,144.16
EXT2-6: Connecter2.6 U1.150 | length 43.3
  Top Layer w0.2: U1.150@106.71,130.196 112.451,130.196 123.1,140.845 123.1,141.53
  Top Layer w0.254: Connecter2.6@114.554,154.178 114.688,154.178 116.294,155.784 120.299,155.784 123.1,152.983 123.1,141.53
EXT2-7: Connecter2.7 U1.144 | length 28
  Top Layer w0.254: U1.144@106.535,127.133 U1.144@106.548,127.146 108.514,127.146
  Mid-Layer 1 w0.254: v1@108.8,126.99 112.014,130.204 Connecter2.7@112.014,151.638
  other v1: 108.76,126.92
EXT2-8: Connecter2.8 U1.137 | length 36.8
  Top Layer w0.254: v1@103.65,123.53 103.766,123.646 U1.137@106.548,123.646
  Mid-Layer 1 w0.254: v1@103.91,123.65 110.862,130.602 110.862,152.115 112.014,153.267 Connecter2.8@112.014,154.178
  other v1: 103.68,123.56
EXT2-9: Connecter2.9 U1.143 | length 30.6
  Top Layer w0.254: v1@103.73,126.36 104.016,126.646 U1.143@106.548,126.646
  Mid-Layer 1 w0.254: v1@103.73,126.34 109.474,132.084 Connecter2.9@109.474,151.638
  other v1: 103.68,126.36
EXT2-10: Connecter2.10 U1.151 | length 44.4
  Top Layer w0.2: U1.151@106.91,130.6 107.006,130.696 112.386,130.696 122.35,140.66 122.35,145.35 v1@122.37,145.37
  Mid-Layer 2 w0.2: Connecter2.10@109.474,154.178 110.423,154.178 111.548,153.053 120.457,153.053 122.39,151.12 v1@122.39,145.27
  other v1: 122.38,145.33
EXT2-11: Connecter2.11 U1.161 | length 17.7
  Top Layer w0.2: U1.161@102.7,135.7 102.748,135.748 102.748,136.082 102.82,136.154 102.82,136.481 102.82,137.62 106.934,141.734 Connecter2.11@106.934,151.638